# EAGLE board Qwiic_keypad (EAGLE 9.2.1)
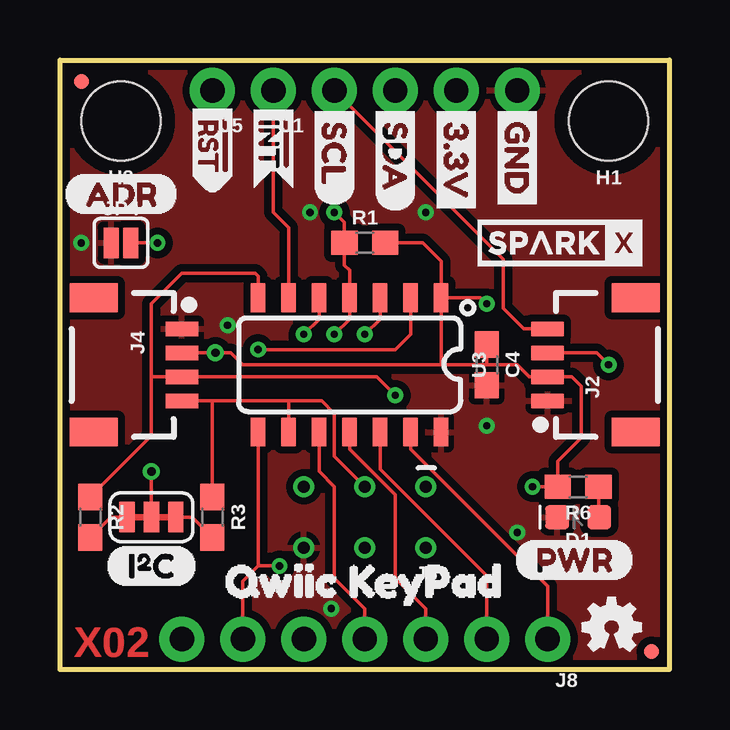
[diagram p0: board, top side]
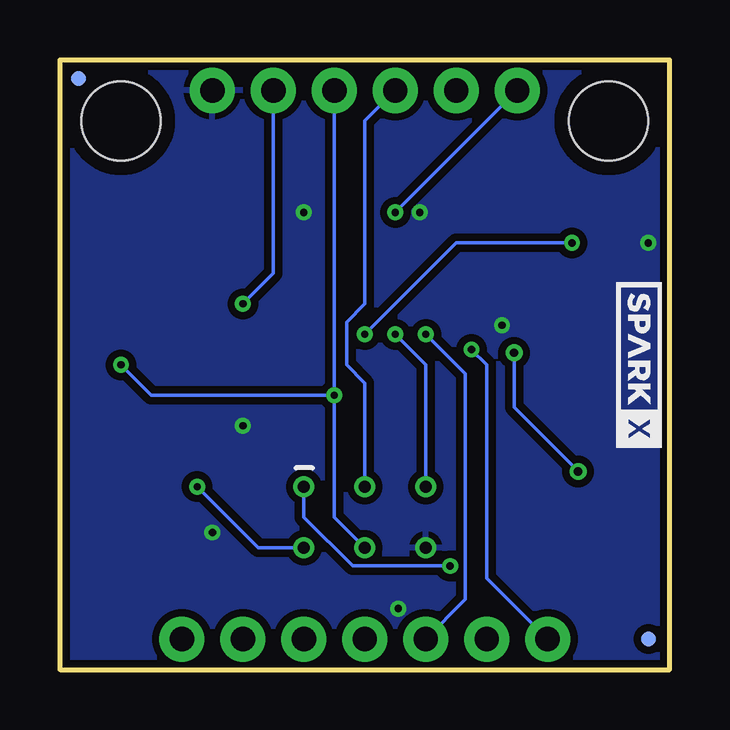
[diagram p1: board, bottom side, seen from below]

Size 25.4 x 25.4 mm. Coordinates in mm from the lower left corner, seen from the top.
Outline: 25.4,0 0,0 0,25.4 25.4,25.4 25.4,0
Copper layers (1*16): Top 0.035mm / dielectric 1.5mm / Bottom 0.035mm
Design rules "SparkFun-2-layer-PCBWay-LIMIT": minimum track width 6mil, minimum drill 0.3mm, track to track 6mil, track to pad 6mil, pad to pad 6mil, via to via 6mil, smd to smd 6mil, copper to edge 6mil, drill to drill 6mil, minimum pad ring 7mil, minimum via ring 7mil, stop-mask expansion 4mil, vias tented up to drill 25mil, thermal gap 10mil

## Footprints (pad centres in the part's own frame; a part is rotated, then mirrored left to right if it is on the bottom)
0603 = smd 1.1 x 1: 1 -0.85,0; 2 0.85,0
LED-0603 = smd 1 x 1: A -0.877,0; C 0.877,0
STAND-OFF = hole 3.302: 0,0
1X01_NO_SILK = drill 1.016 pad 1.88: 1 0,0
1X04_1MM_RA = smd 0.6 x 1.35: 1 -1.5,0; 2 -0.5,0; 3 0.5,0; 4 1.5,0 | smd 1.2 x 2: NC1 2.8,-3.675; NC2 -2.8,-3.675
1X04_NO_SILK = drill 1.016 pad 1.88: 1 0,0; 2 2.54,0; 3 5.08,0; 4 7.62,0
2X3_TEST_POINTS = drill 0.508: 1 -2.54,-1.27; 2 -2.54,1.27; 3 0,-1.27; 4 0,1.27; 5 2.54,-1.27; 6 2.54,1.27
1X07_NO_SILK = drill 1.016 pad 1.88: 1 0,0; 2 2.54,0; 3 5.08,0; 4 7.62,0; 5 10.16,0; 6 12.7,0; 7 15.24,0
MICRO-FIDUCIAL = smd 0.635 x 0.635: 1 0,0
SMT-JUMPER_2_NO_SILK = smd 0.635 x 1.27: 1 -0.406,0; 2 0.406,0
SMT-JUMPER_3_2-NC_TRACE_SILK = smd 0.635 x 1.27: 1 -1.016,0; 2 0,0; 3 1.016,0
SO14 = smd 0.6 x 1.2: 1 -3.175,-2.8; 2 -1.905,-2.8; 3 -0.635,-2.8; 4 0.635,-2.8; 5 1.905,-2.8; 6 3.175,-2.8; 7 4.445,-2.8; 8 4.445,2.8; 9 3.175,2.8; 10 1.905,2.8; 11 0.635,2.8; 12 -0.635,2.8; 13 -1.905,2.8; 14 -3.175,2.8

## Placement (x,y rotation side)
C4  0.1uF  [0603]  17.78,12.7 270 top
D1  RED  [LED-0603]  21.59,6.35 180 top
FRAME1  FRAME-LETTER  [CREATIVE_COMMONS]  -13.97,-11.43 0 top  (outside the outline)
H1  STAND-OFF  [STAND-OFF]  22.86,22.86 180 top
H2  STAND-OFF  [STAND-OFF]  2.54,22.86 180 top
J1  [1X01_NO_SILK]  8.89,24.13 180 top
J2  [1X04_1MM_RA]  20.32,12.7 90 top
J3  PTH  [1X04_NO_SILK]  19.05,24.13 180 top
J4  [1X04_1MM_RA]  5.08,12.7 270 top
J5  [1X01_NO_SILK]  6.35,24.13 180 top
J6  AVR_SPI_PROG_3X2TESTPOINTS  [2X3_TEST_POINTS]  12.7,6.35 180 top
J8  [1X07_NO_SILK]  20.32,1.27 180 top
JP1  FIDUCIALUFIDUCIAL  [MICRO-FIDUCIAL]  0.89,1.27 180 bottom
JP2  FIDUCIALUFIDUCIAL  [MICRO-FIDUCIAL]  0.89,24.51 180 top
JP3  FIDUCIALUFIDUCIAL  [MICRO-FIDUCIAL]  24.64,24.64 180 bottom
JP4  [SMT-JUMPER_2_NO_SILK]  2.54,17.78 0 top
JP6  FIDUCIALUFIDUCIAL  [MICRO-FIDUCIAL]  24.64,0.76 180 top
LOGO1  OSHW-LOGOMINI  [OSHW-LOGO-MINI]  22.99,1.78 0 top
R1  4.7k  [0603]  12.7,17.78 0 top
R2  2.2k  [0603]  1.27,6.35 270 top
R3  2.2k  [0603]  6.35,6.35 270 top
R6  1k  [0603]  21.59,7.62 180 top
SJ5  [SMT-JUMPER_3_2-NC_TRACE_SILK]  3.81,6.35 180 top
U3  ATTINY84  [SO14]  12.7,12.7 180 top
U$1  SPARKX-LOGO3  [SPARKX-SMALL]  1.27,12.7 270 bottom
U$2  SPARKX-LOGO3  [SPARKX-SMALL]  20.83,17.78 0 top
U$3  [3.3V]  16.51,23.75 270 top
U$4  [GND]  19.05,23.75 270 top
U$5  [SDA]  13.97,23.75 270 top
U$6  [SCL]  11.43,23.75 270 top
U$8  [(PWR)]  18.92,4.57 0 top
U$9  [(I_SUPER2_C)]  1.91,4.32 0 top
U$10  [(ADR)]  0.13,19.81 0 top
U$11  [#RST>]  6.35,24 270 top
U$12  [#INT1]  8.89,24 270 top
U$15  [QWIIC_KEYPAD0]  5.71,3.68 0 top

## Library data of the parts
C4 = SparkFun-Capacitors; PROD_ID: CAP-00810
D1 = SparkFun-LED; PROD_ID: DIO-00819
FRAME1 LOGO1 = SparkFun-Aesthetics
H1 H2 = SparkFun-Hardware
J1 J5 J6 J8 = SparkFun-Connectors
J2 J4 = SparkFun-Connectors; PROD_ID: CONN-13694
J3 U$1 U$2 = SparkX
JP1-JP3 JP6 = SparkFun
JP4 SJ5 = SparkFun-Jumpers
R1 = SparkFun-Resistors; PROD_ID: RES-07857
R2 R3 = SparkFun-Resistors; PROD_ID: RES-08272
R6 = SparkFun-Resistors; PROD_ID: RES-07856
U3 = SparkFun-IC-Microcontroller; PROD_ID: IC-11285
U$3-U$6 U$8-U$11 = Labels-0_04
U$12 = buzzard_labels (12)
U$15 = buzzard_labels (10)

## Nets
1: J8.1 U3.13
2: J8.2 U3.12
3: J8.3 U3.11
3.3V: C4.1 J2.2 J3.2 J4.2 J6.2 R1.2 R6.2 SJ5.2 U3.1
4: J8.4 U3.10
5: J8.5 U3.5
7: J8.7 U3.2
!INT: J1.1 U3.6
!RST: J5.1 J6.5 R1.1 U3.4
ADD1: JP4.2 U3.3
GND: C4.2 D1.C J2.1 J3.1 J4.1 J6.6 JP4.1 U3.14
MISO/6: J6.1 J8.6 U3.8
N$1: D1.A R6.1
N$2: R2.2 SJ5.3
N$3: R3.2 SJ5.1
SCL: J2.4 J3.4 J4.4 J6.3 R3.1 U3.9
SDA: J2.3 J3.3 J4.3 J6.4 R2.1 U3.7

## Tracks (layer width: path | path; a pad name or v marks a point on that pad's centre or on a via)
1
  Top 0.152: U3.13 14.61,9.19 20.32,3.47 J8.1
2
  Top 0.152: 13.34,9.4 U3.12 13.34,8.35 17.78,3.9 J8.2
3
  Top 0.152: J8.3 15.24,2.54 13.97,3.81 13.97,7.28 12.06,9.19 U3.11
3.3V  (via drill 0.3, 0.35)
  Top 0.152: 17.78,12.7 19.05,12.7 19.55,12.2 J2.2 21.33,12.2 21.72,11.81 21.72,9.65 20.74,8.68 R6.2 v19.68,7.62 | 17.78,12.7 15.88,12.7 | 15.88,12.7 7.62,12.7 7.12,13.2 v6.48,13.2 J4.2 | C4.1 17.78,12.7 | U3.1 15.88,12.7 | R1.2 15.11,17.78 15.88,17.02 U3.1 | U3.1 17.52,15.5 v17.78,15.24 | SJ5.2 v3.81,8.26
  Bottom 0.152: J6.2 17.14,5.08 v19.68,7.62 | J3.2 16.51,16.51 v17.78,15.24 | v3.81,8.26 6.48,10.92 v6.48,13.2
4
  Top 0.152: J8.4 12.7,2.54 11.43,3.81 11.43,7.62 10.79,8.26 U3.10
5  (via drill 0.3)
  Top 0.152: U3.5 10.79,14.61 v10.16,13.97
  Bottom 0.152: v10.16,13.97 8.51,12.32 8.51,2.92 J8.5
7  (via drill 0.3)
  Top 0.152: v8.26,13.34 13.97,13.34 14.61,13.97 U3.2
  Bottom 0.152: J8.7 7.62,3.81 7.62,12.7 v8.26,13.34
!INT
  Top 0.152: U3.6 9.53,18.41 8.89,19.05 J1.1
!RST  (via drill 0.3)
  Top 0.152: v11.43,19.05 11.85,18.63 R1.1 11.85,16.85 12.06,16.64 U3.4 12.06,14.61 v11.43,13.97
  Bottom 0.152: J5.1 v11.43,19.05 | J6.5 10.16,12.7 v11.43,13.97
ADD1  (via drill 0.3)
  Top 0.152: JP4.2 v4.06,17.78 | U3.3 13.34,14.61 v12.7,13.97
  Bottom 0.152: v12.7,13.97 8.89,17.78 v4.06,17.78
GND  (via drill 0.3)
  other vias: 17.78,10.16 11.3,2.54 0.89,17.78 6.99,14.35 10.41,19.05 15.24,19.05 19.05,5.71
  pour Bottom (isolate 0.305): 25.4,25.4 25.4,0 0,0 0,25.4
  pour Top (isolate 0.305): 25.4,25.4 25.4,0 0,0 0,25.4
MISO/6  (via drill 0.3)
  Top 0.152: 8.26,4.32 U3.8 | J8.6 7.62,3.68 8.26,4.32 | 8.26,4.32 v9.14,4.32
  Bottom 0.152: J6.1 15.24,6.35 13.21,4.32 v9.14,4.32
N$1
  Top 0.152: R6.1 22.44,6.38 D1.A
N$2
  Top 0.152: R2.2 2.12,6.35 SJ5.3
N$3
  Top 0.152: R3.2 5.5,6.35 SJ5.1
SCL
  Top 0.152: J4.4 6.35,11.2 | 6.35,11.2 9.53,11.2 | 9.53,11.2 10.9,11.2 11.43,10.67 11.43,8.89 J6.3 | J3.4 18.47,17.09 18.47,15.06 19.33,14.2 J2.4 | U3.9 9.53,11.2 | R3.1 6.35,11.2
  Bottom 0.152: J6.3 12.7,11.94 13.46,12.7 13.46,14.48 12.7,15.24 12.7,22.86 J3.4
SDA  (via drill 0.3)
  Top 0.152: 3.81,12.19 J4.3 13.2,12.2 v13.97,11.43 | J2.3 22.36,13.2 v22.86,12.7 | 3.81,12.19 3.81,15.24 5.08,16.51 8.13,16.51 8.26,16.38 U3.7 | 3.81,12.19 3.81,11.43 3.81,10.92 3.81,9.74 R2.1
  Bottom 0.152: J6.4 13.97,6.35 v13.97,11.43 | v13.97,11.43 21.59,11.43 v22.86,12.7 | J3.3 v13.97,11.43

## Text on the board
Top: X02
tDocu: Kevin Kuwata